# Altium PCB EDR Project PCB_atmega328p.PcbDoc (part 2 of 2)
Units mm, origin at the board's own origin, x right, y up, seen from the top; angles counter-clockwise.
Board outline 105 x 60 mm, 2 copper layers (Top Layer, Bottom Layer); 62 components, 52 nets, 237 pads, 86 vias.
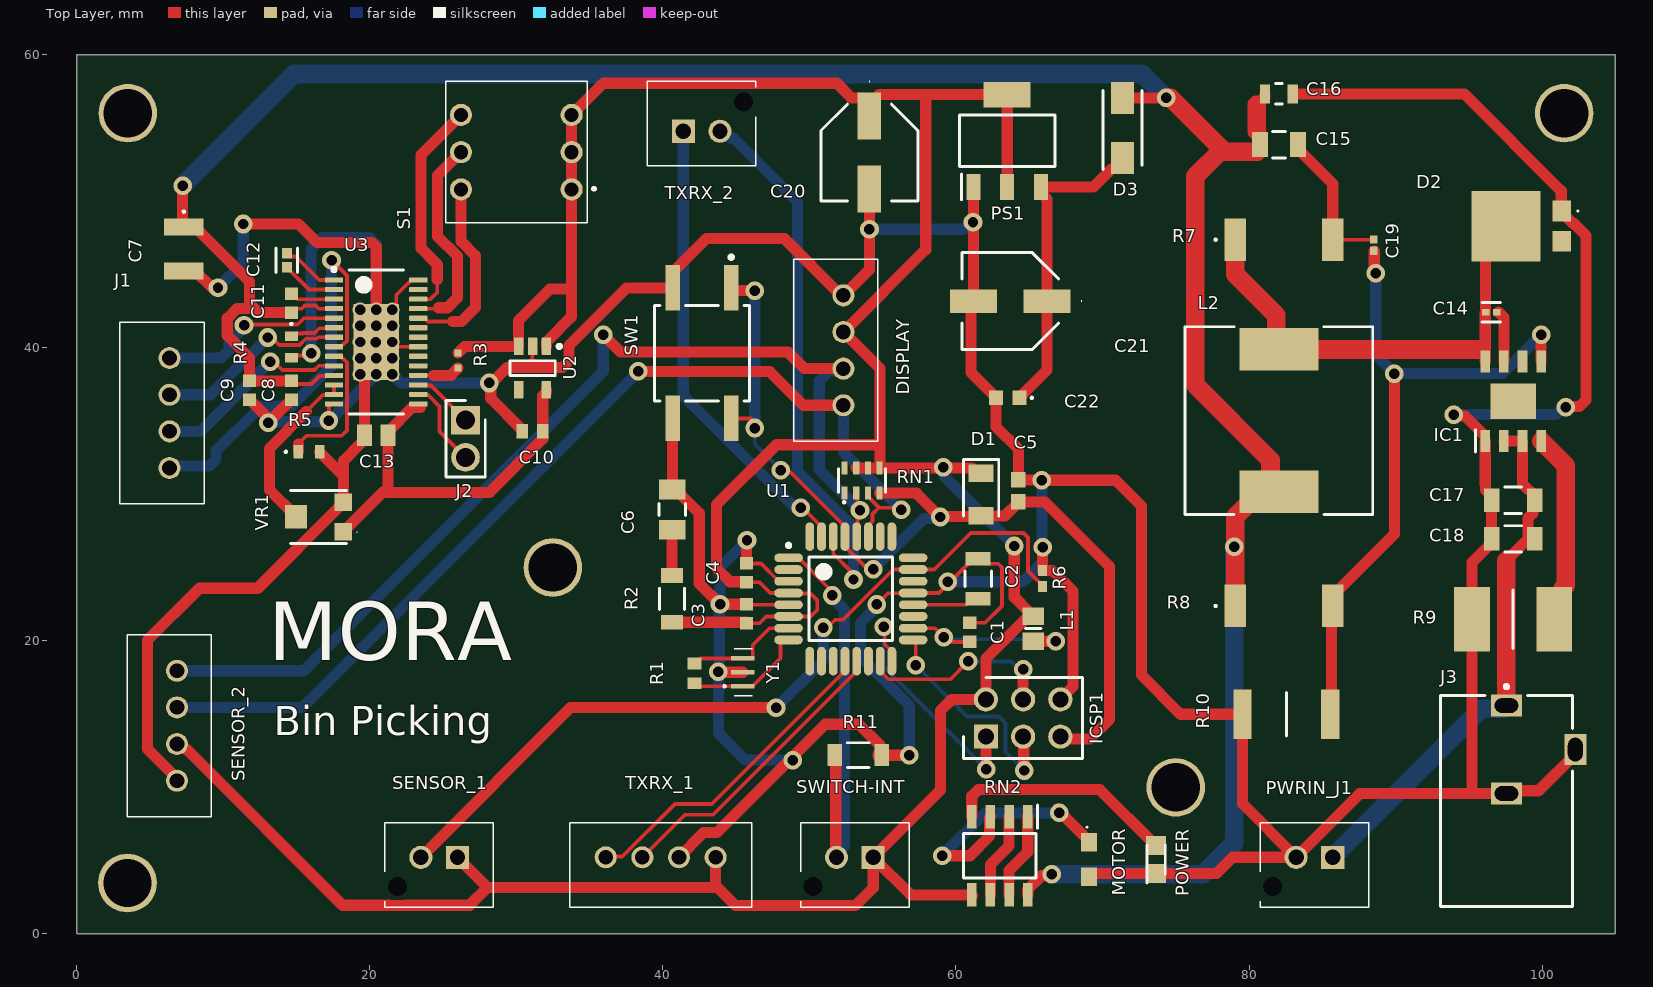
[diagram p0: Top Layer view]

## Via types
v1: diameter 1.27, hole 0.711, Top Layer to Bottom Layer, 56 vias
v2: diameter 1, hole 0.711, Top Layer to Bottom Layer, 15 vias
v3: diameter 0.5, hole 0.2, Top Layer to Bottom Layer, 15 vias

## Nets (pads, with @x,y where several pads share a name; then routed paths per layer and width w, separated by ;. In a path a pad name is that pad's centre, name@x,y a point inside that pad or via, vN(x,y) a via of type N, cw(c..) or ccw(c..) an arc to the next point about the centre after c; other vN are vias at no path point) (continued)
NetC21_1: (continued)
  Top Layer w0.762: C22.1 64.336,36.601 66.212,38.477 C21.1 66.212,50.151 65.798,50.565 PS1.3 69.397,50.965 70.653,52.221 70.978,52.221 71.372,52.615 D3.1
NetIC1_4: IC1.4 R9.1 | length 13.2
  Top Layer w1.27: IC1.4 101.6,31.962 101.6,23.772 101.412,23.584 101.412,22.053 R9.1
NetMOTOR_1: MOTOR.1 RN2.3 | length 17.5
  Top Layer w0.762: v1(59.055,5.334) 60.96,5.334 62.299,6.673 62.299,7.953 RN2.3 ; v1@66.929,8.509 66.929,8.487 69.086,6.33 MOTOR.1
  Bottom Layer w0.762: v1(59.055,5.334) 61.976,8.255 v1(67.056,8.255)
NetPOWER_2: POWER.2 RN2.4 | length 15.7
  Top Layer w0.762: RN2.4 61.085,9.409 61.531,9.855 69.808,9.855 73.633,6.03 POWER.2
NetR1_1: R1.1 U1.8 Y1.1 | length 8.5
  Top Layer w0.254: R1.1 42.371,16.896 Y1.1 46.114,16.896 48.032,18.814 48.032,19.9 48.192,20.06 U1.8
NetR1_2: R1.2 U1.7 Y1.3 | length 7.9
  Top Layer w0.254: R1.2 42.237,18.455 42.578,18.796 Y1.3 46.114,18.796 46.137,18.819 46.137,19.721 47.276,20.86 U1.7
NetR3_2: R3.2 U3.18 | length 2.9
  Top Layer w0.254: U3.18 24.348,38.111 24.359,38.1
  Top Layer w0.762: 24.359,38.1 25.529,38.1 R3.2
NetR4_1: R4.1 U3.6 | length 3.2
  Top Layer w0.254: R4.1 14.858,40.965 15.454,40.965 15.484,40.995 16.236,40.995 16.564,41.323 17.532,41.323 U3.6
NetR5_1: R5.1 U3.9 | length 9.9
  Top Layer w0.254: 15.135,33.423 15.697,33.985 18.085,33.985 18.449,34.349 18.449,39.011 18.271,39.19 18.241,39.19 18.068,39.363 17.618,39.363 U3.9
  Top Layer w0.762: R5.1 15.135,33.423
NetR6_1: R6.1 SENSOR_1.2 U1.23 | length 55.8
  Top Layer w0.254: v1(50.952,20.904) 51.227,20.904 51.765,21.442 52.303,21.442 55.721,24.86 U1.23 58.515,24.86 61.011,27.356 64.618,27.356 64.922,27.051 64.922,24.761 65.506,24.178 65.515,24.178 65.911,23.782 R6.1
  Top Layer w0.762: SENSOR_1.2 33.71,15.443 v1(47.727,15.443)
  Bottom Layer w0.762: v1(47.727,15.443) 50.952,18.669 v1(50.952,20.904)
NetRN2_1: RN2.1 RN2.7 | length 5.9
  Top Layer w0.762: RN2.7 63.625,4.316 64.895,5.586 RN2.1
NetRN2_2: RN2.2 RN2.6 | length 5.9
  Top Layer w0.762: RN2.6 62.355,4.727 63.625,5.997 RN2.2
NetTXRX_1_3: TXRX_1.3 U1.13 | length 20.6
  Top Layer w0.254: TXRX_1.3 41.508,8.128 43.423,8.128 46.942,11.647 53.23,17.935 U1.13
NetTXRX_1_4: TXRX_1.4 U1.12 | length 22.3
  Top Layer w0.254: TXRX_1.4 36.157,5.277 37.237,5.277 40.825,8.865 43.343,8.865 52.43,17.952 U1.12
NetTXRX_2_1: TXRX_2.1 U1.31 | length 31.9
  Top Layer w0.254: v1(49.403,29.083) 49.532,29.083 50.83,27.785 U1.31
  Bottom Layer w0.762: TXRX_2.1 41.4,36.69 49.007,29.083 v1(49.403,29.083)
NetTXRX_2_2: TXRX_2.2 U1.30 | length 38.1
  Top Layer w0.254: U1.30 51.63,25.942 52.815,24.756 52.815,24.375 v1(53.01,24.181)
  Bottom Layer w0.762: TXRX_2.2 44.12,54.765 44.58,54.305 44.831,54.305 49.201,49.936 49.201,31.534 53.01,27.725 v1(53.01,24.181)
NetU1_2: U1.2
NetU1_32: U1.32
NetU3_12: U3.12 U3.13 VR1.2 | length 12
  Top Layer w0.254: 15.672,35.636 16.799,36.763 17.072,36.763 17.12,36.811 U3.13 U3.12
  Top Layer w0.762: VR1.2 14.96,28.498 13.157,30.301 13.157,33.122 15.672,35.636
NetU3_20: U3.20
NetU3_22: U3.22
RESET_MCU: C5.2 D1.2 ICSP1.5 RN1.7 SW1.1 SW1.2 U1.29 | length 66
  Top Layer w0.254: SW1.2 45.979,35.174 45.979,35.09 46.279,34.79 v1(46.279,34.515) ; v1@47.549,31.648 v1(48.058,31.648) 48.567,31.648 52.43,27.785 U1.29 52.43,26.435 53.973,24.892 v1@54.102,24.892
  Top Layer w0.762: SW1.1 44.67,44.01 44.789,43.891 v1(46.279,43.891) ; RN1.7 57.289,30.087 v1(58.928,28.448) 58.965,28.485 61.683,28.485 D1.2 63.331,28.522 64.26,29.451 C5.2 66.066,29.476 70.485,25.057 70.485,14.63 69.147,13.292 67.294,13.292 ICSP1.5
  Bottom Layer w0.254: v1(46.279,34.515) 46.279,33.427 v1(48.058,31.648)
  Bottom Layer w0.762: v1(46.279,34.515) v1(46.279,43.891) ; v1(54.356,24.892) 57.815,28.351 58.831,28.351 v1(58.928,28.448)
RESET_MOTOR_DRIVER: J2.2 U3.16 | length 6
  Top Layer w0.254: U3.16 23.368,36.763 23.994,36.763 24.765,35.992 24.765,34.288 J2.2
SCK: ICSP1.3 U1.17 | length 15.7
  Top Layer w0.254: U1.17 57.092,20.06 57.252,19.9 v1(57.252,18.339)
  Top Layer w0.762: ICSP1.3 64.626,13.42 64.626,11.193 v1(64.668,11.151)
  Bottom Layer w0.254: v1(57.252,18.339) 60.757,14.834 62.916,14.834 63.382,14.367 63.382,12.437 v1(64.668,11.151)
SCL: DISPLAY.2 RN1.3 SENSOR_2.4 U1.28 | length 72.6
  Top Layer w0.254: RN1.3 53.266,30.013 53.266,28.878 v1@53.34,28.804 ; U1.28 53.285,27.165 53.285,28.749 v1@53.34,28.804 ; v1(53.457,28.895) 53.431,28.895 v1@53.34,28.804
  Top Layer w0.762: v1(35.941,40.869) 37.109,39.7 48.527,39.7 49.659,38.568 DISPLAY.2
  Bottom Layer w0.762: SENSOR_2.4 15.49,17.954 35.941,38.405 v1(35.941,40.869) ; DISPLAY.2 52.181,38.427 51.381,38.427 50.673,37.719 50.673,31.678 v1(53.457,28.895)
SDA: DISPLAY.1 RN1.5 SENSOR_2.3 U1.27 | length 69.8
  Top Layer w0.254: RN1.5 53.992,29.85 54.748,29.094 ; U1.27 54.03,27.879 54.314,28.163 54.314,28.66 54.737,29.083 ; 54.759,29.083 56.122,29.083 v1(56.261,28.944)
  Top Layer w0.762: v1(38.329,38.379) 47.295,38.379 49.606,36.068 DISPLAY.1
  Bottom Layer w0.762: SENSOR_2.3 15.403,15.454 v1(38.329,38.379) ; DISPLAY.1 52.322,32.883 v1(56.261,28.944)
SLEEP: J2.1 U3.17 | length 4.2
  Top Layer w0.254: U3.17 23.368,37.413 24.18,37.413 J2.1
VCC: C3.2 C4.2 C20.1 D1.1 DISPLAY.3 ICSP1.2 L1.1 PS1.2 PS1.4 R2.2 R3.1 RN1.4 RN1.6 RN1.8 RN2.5 S1.1 S1.3 S1.5 SENSOR_1.1 SENSOR_2.2 SWITCH-INT.1 TXRX_1.1 U1.4 U1.6 U2.1 U2.3 | length 242.3
  Top Layer w0.254: C3.2 46.594,21.194 47.06,21.66 U1.6 50.083,21.66 50.546,22.123 50.546,22.758 50.085,23.22 48.62,23.22 U1.4 47.327,23.26 46.599,23.988 C4.2
  Top Layer w0.762: SENSOR_2.2 7.056,12.954 7.425,12.585 7.532,12.585 18.161,1.956 21.351,1.956 21.362,1.945 22.424,1.945 22.435,1.956 26.825,1.956 28.044,3.175 ; SENSOR_1.1 28.044,3.175 ; R3.1 26.488,40.083 U2.3 30.163,41.847 32.309,43.993 33.78,43.993 ; U2.1 32.063,40.394 33.78,42.111 33.78,43.993 ; R2.2 C3.2@45.718,21.26 ; TXRX_1.1 43.606,3.308 ; C4.2 45.674,24.032 44.573,24.032 43.663,24.943 43.663,29.286 47.752,33.376 54.813,33.376 ; RN1.4 RN1.6 RN1.8 ; C20.1 C20.1@54.1,56.615 ; RN2.5@61.141,2.603 RN2.5 56.921,2.659 SWITCH-INT.1 ; D1.1 61.47,31.422 61.105,31.787 RN1.8 ; PS1.2 PS1.4 57.937,57.265 ; v1(63.983,26.467) 63.983,22.971 L1.1@64.932,22.022 ; L1.1 65.057,21.459 64.714,21.459 62.044,18.789 ICSP1.2 59.715,16.002 58.953,15.24 58.953,9.825 SWITCH-INT.1 ; 28.044,3.175 43.473,3.175 43.606,3.308 ; 33.78,43.993 S1.1 S1.3 S1.5 35.946,58.046 51.869,58.046 52.881,57.034 53.681,57.034 C20.1@54.1,56.615 ; 43.606,3.308 44.969,1.945 53.151,1.945 54.354,3.148 SWITCH-INT.1 ; C20.1@54.1,56.615 54.75,57.265 57.937,57.265 ; RN1.8 54.813,31.808 54.813,33.376 ; 54.813,33.376 54.813,38.577 DISPLAY.3 57.937,46.683 57.937,57.265
  Bottom Layer w0.762: v1(59.131,31.852) 59.228,31.754 59.228,31.221 v1(63.983,26.467)
pads on no net: D2.2 IC1.6 IC1.9 PWRIN_J1.MH1 RN1.1 RN1.2 SENSOR_1.MH1 SWITCH-INT.MH1 TXRX_2.MH1 U1.9 U1.10 U1.11 U1.14 U1.19 U1.22 U1.24 U1.25 U1.26 U2.4 U3.19 U3.23 U3.27

## Silkscreen, mask and mechanical layers (free items; w line width, h text height)
Top Overlay:
  text "MORA" at 13.081,18.669 h4
  text "Bin Picking" at 13.462,13.565 h2